# Altium PCB PCB_HW_.PcbDoc (part 1 of 2)
Units mm, origin at the board's own origin, x right, y up, seen from the top; angles counter-clockwise.
Board outline 140.28 x 161.54 mm, 2 copper layers (Top Layer, Bottom Layer); 173 components, 176 nets, 651 pads, 150 vias.
Unrouted connection lines stored in the file: 54.
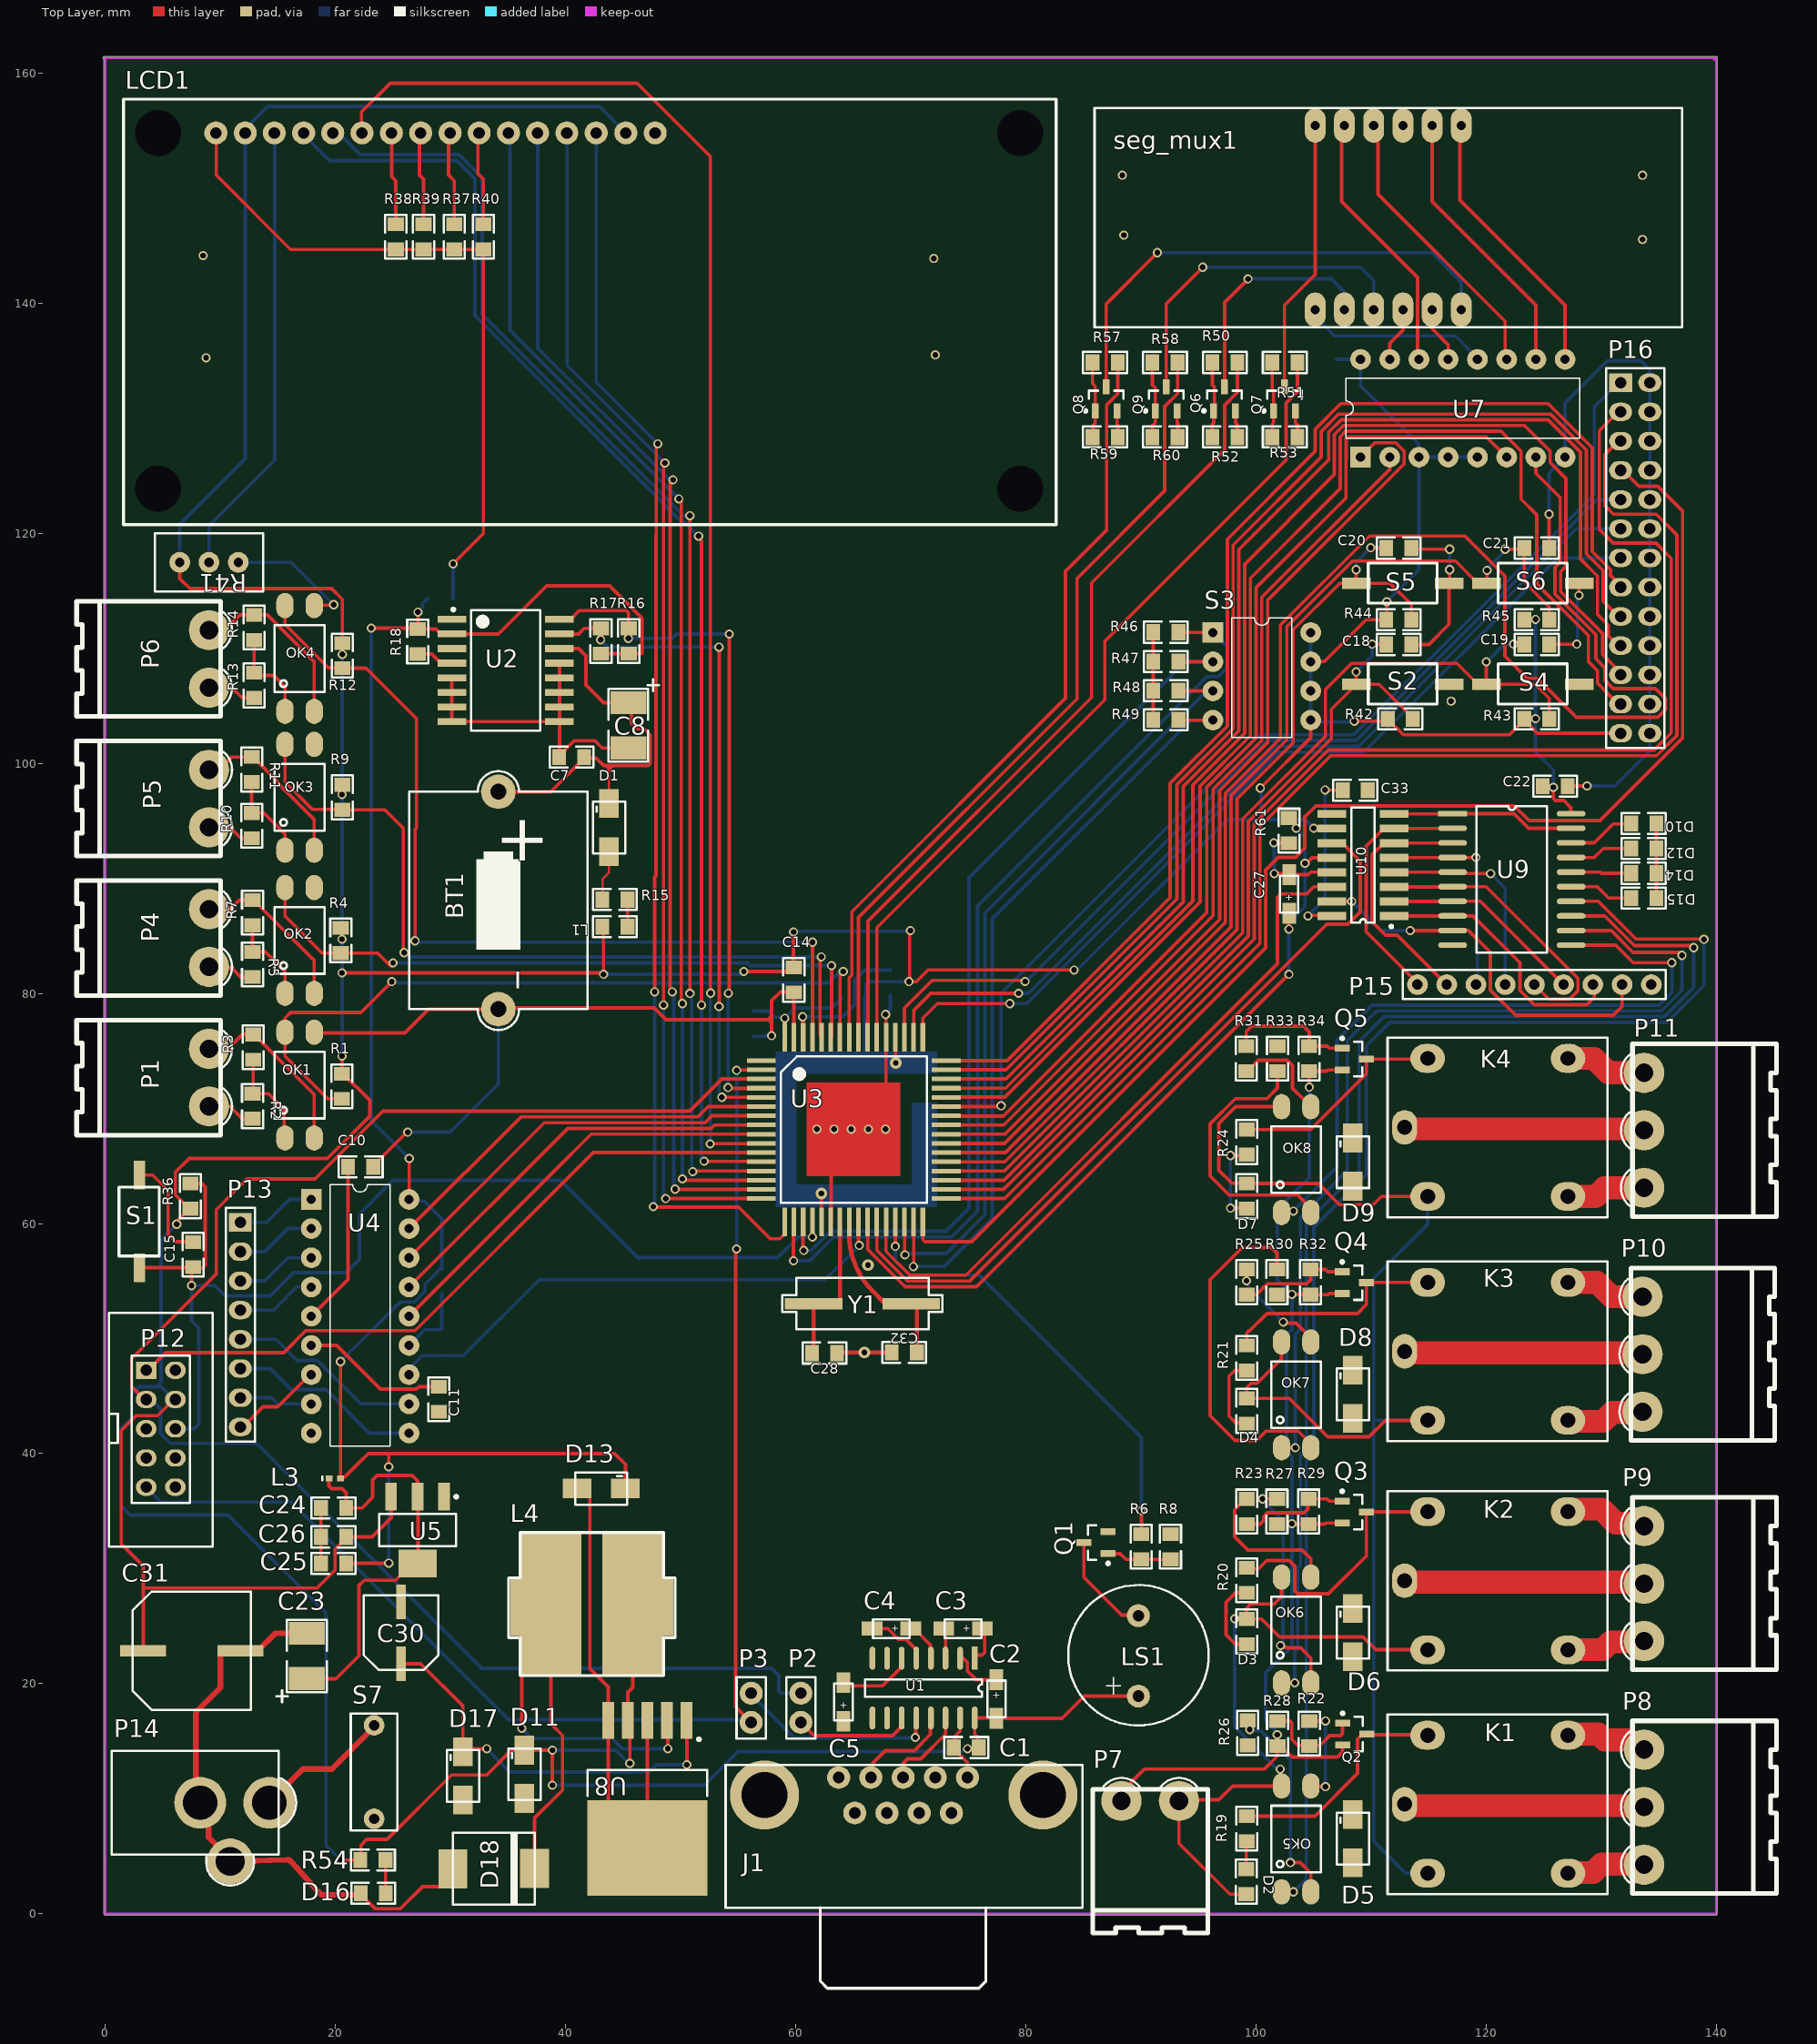
[diagram p0: Top Layer view]
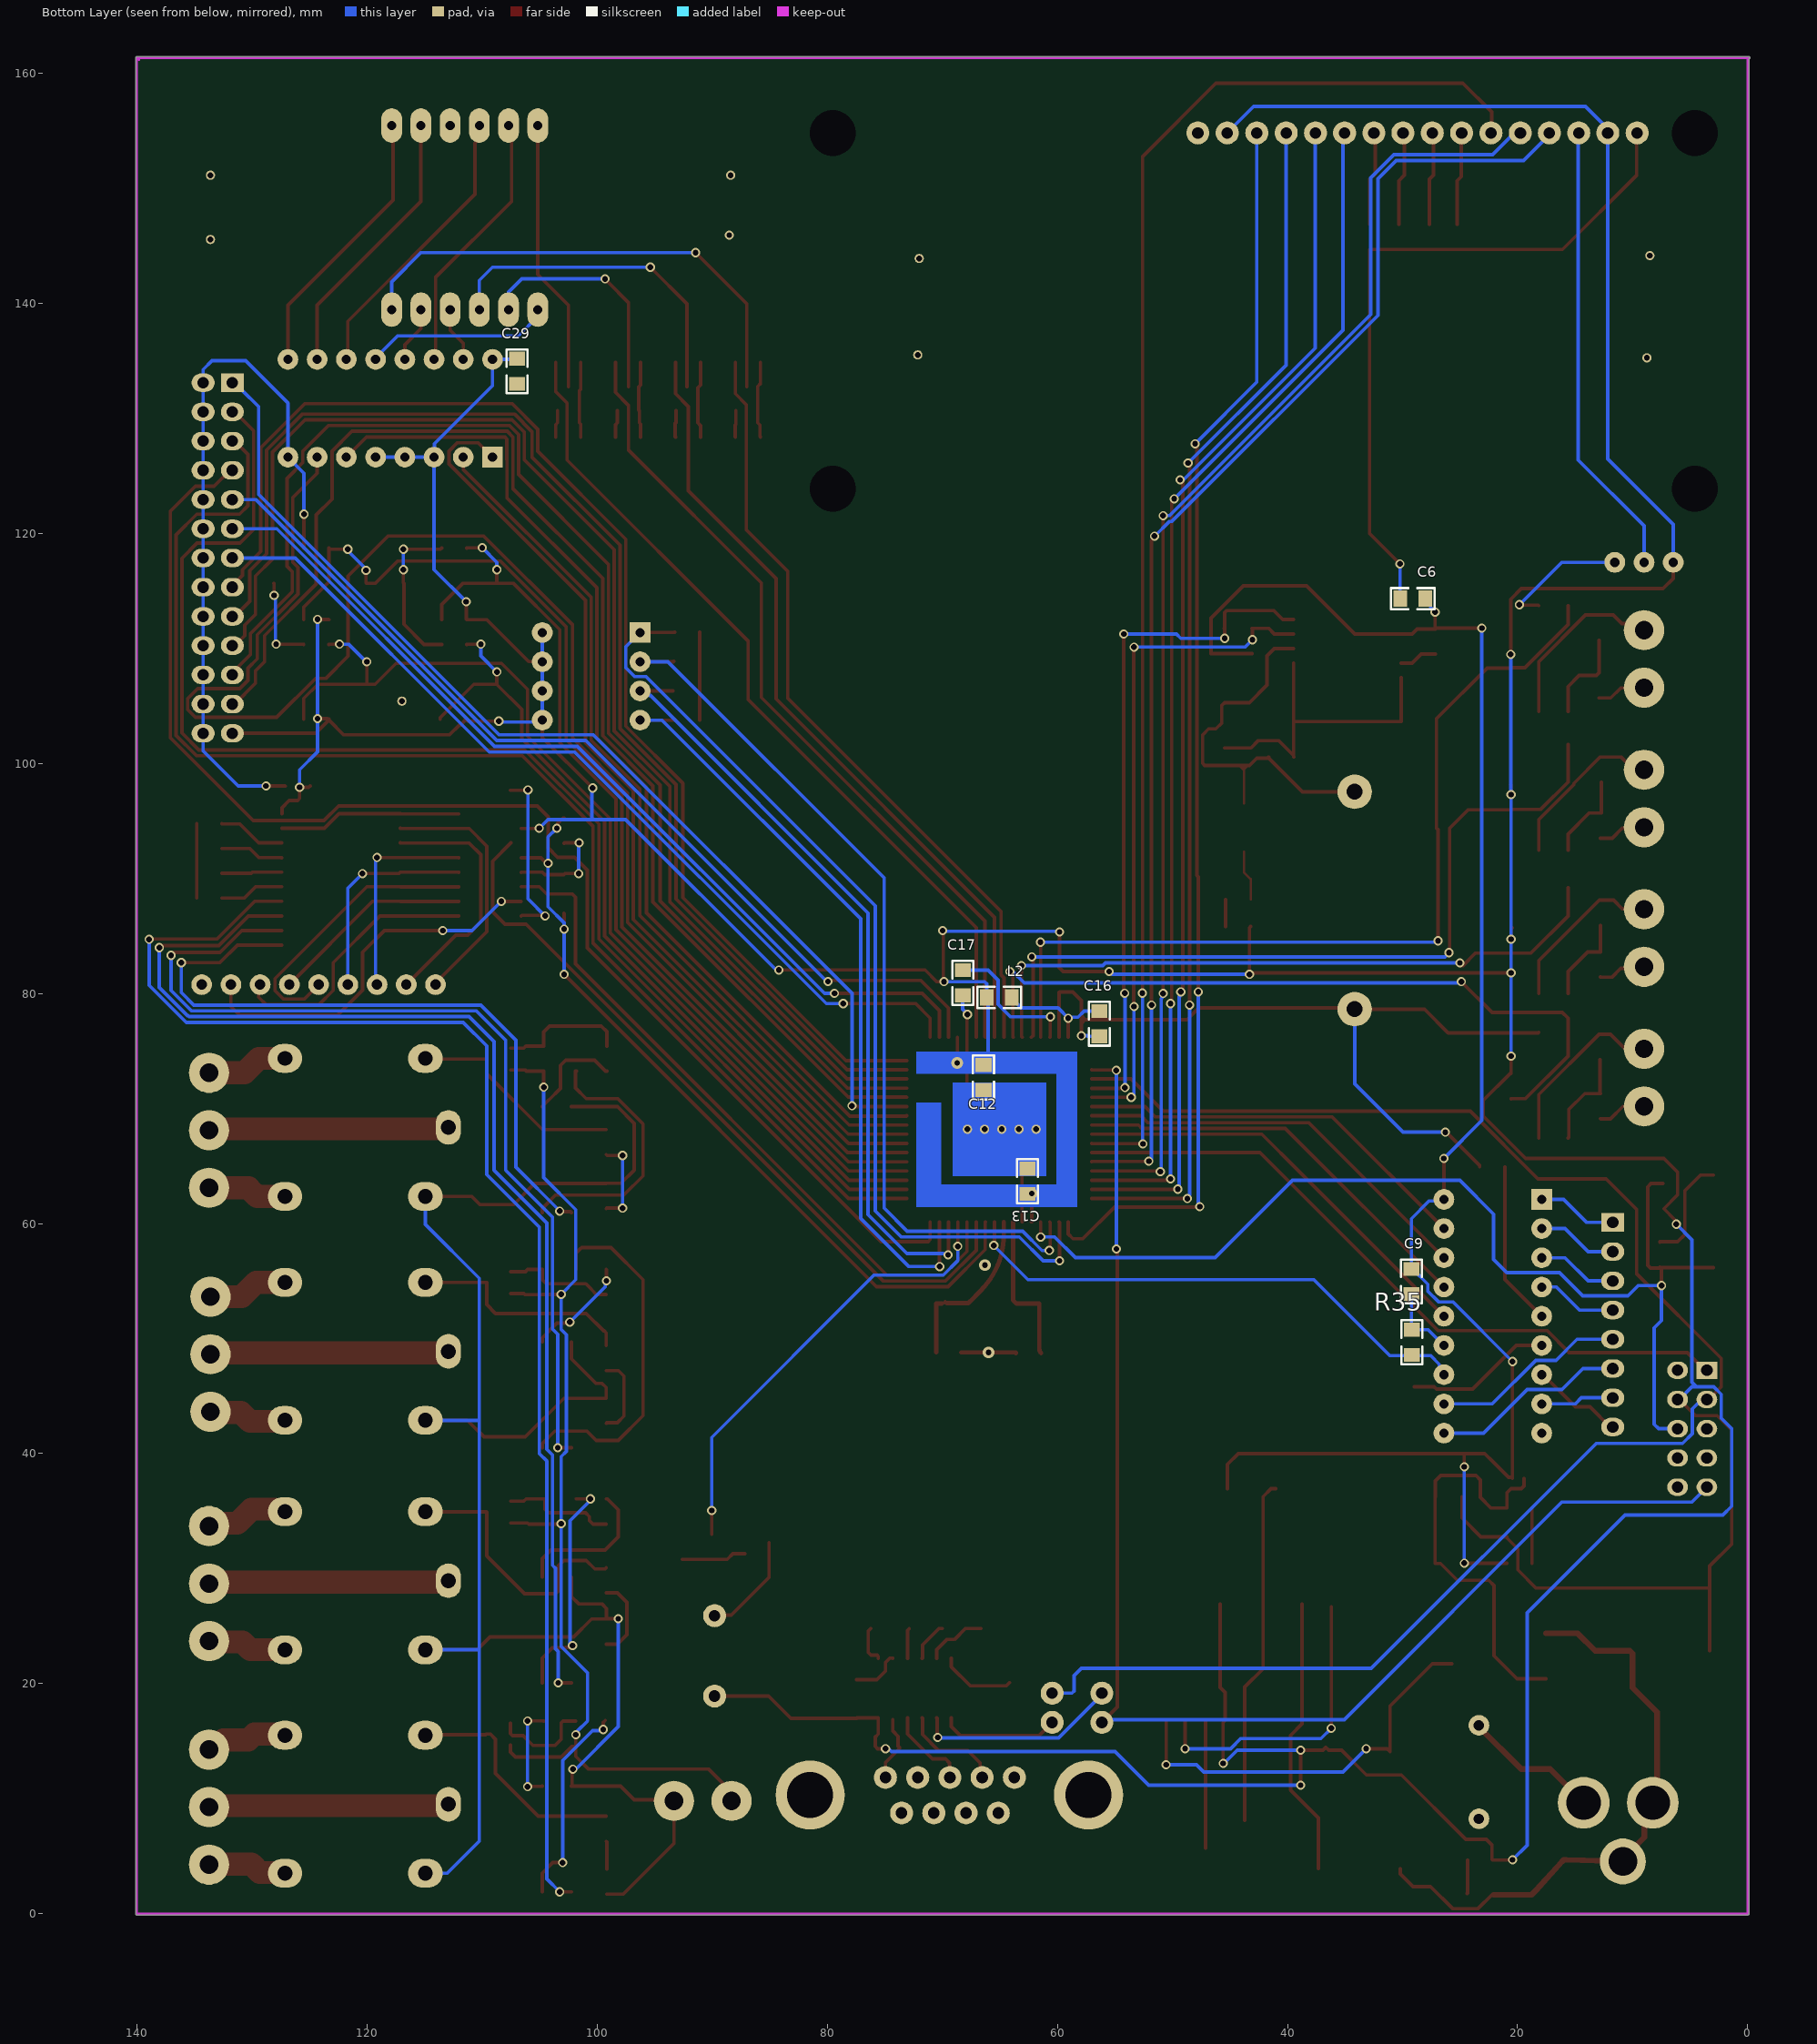
[diagram p1: Bottom Layer view, seen from below]

## Layer stack, top to bottom
Top Solder: solder mask 0.0102, Solder Resist, Dk 3.5
Top Layer: signal copper 0.0356
Dielectric 1: dielectric 0.32, FR-4, Dk 4.8
Bottom Layer: signal copper 0.0356
Bottom Solder: solder mask 0.0102, Solder Resist, Dk 3.5

## Board outline
-0.1,0 -0.1,161.213 -0.152,161.265 cw(c-0.081,161.336) -0.081,161.436 140,161.436 cw(c140,161.336) 140.1,161.336 140.1,0 cw(c140,0) 140,-0.1 0,-0.1 cw(c0,0)

## Design rules (kind name [scope] priority, off if disabled: settings)
Clearance [All] p1: gap=0.2 ignorepadtopadclearanceinfootprint=FALSE except(0.3: Arc-Fill Arc-Poly Arc-Region Track-Fill Track-Poly Track-Region SMDPad-Fill SMDPad-Poly SMDPad-Region THPad-Fill THPad-Poly THPad-Region Via-Fill Via-Poly Via-Region Fill-Fill Fill-Poly Fill-Region Poly-Poly Poly-Region Region-Region)
PolygonConnect [All] p1: connectstyle=Relief reliefconductorwidth=0.254 reliefentries=4 polygonreliefangle="90 Angle" airgapwidth=0.254
RoutingVias [All] p1: holewidth=0.5 width=0.8 viastyle="Through Hole" minholewidth=0.2 minwidth=0.2 maxholewidth=2 maxwidth=3
SolderMaskExpansion [All] p1: expansion=0.102 istentingtop=FALSE
Width [All] p1: maxlimit=2 minlimit=0.2 preferedwidth=0.3
30 further rules are at their usual default settings.

## Components (designator, comment, footprint, x,y, rotation, side; value= is the part's Value field where it differs from the comment)
BT1 "3V6" CHARGING_BATT 35.433,97.536 r270 top
C1 "100nF" smd_805 74.803,14.478 r270 top
C2 "Cap Pol1" CAP_SMD_A 77.47,18.669 r270 top value=1uF
C3 "tantalium A" CAP_SMD_A 74.549,24.765 r180 top value=1uF
C4 "tantalium A" CAP_SMD_A 68.326,24.765 r180 top value=1uF
C5 "Cap Pol1" CAP_SMD_A 64.135,18.415 r90 top value=1uF
C6 "Cap" smd_805 29.083,114.3 r90 bottom value=100nF
C7 "Cap" smd_805 40.513,100.584 r270 top value=100nF
C8 "Cap Pol1" C_B 45.464,103.242 r180 top value=10UF
C9 "Cap" smd_805 29.21,54.991 r0 bottom value=100nF
C10 "Cap" smd_805 22.225,64.897 r90 top value=10nF
C11 "Cap" smd_805 28.956,44.704 r0 top value=100nF
C12 "Cap" smd_805 66.446,72.669 r180 bottom value=100pF
C13 "Cap" smd_805 62.586,63.703 r0 bottom value=100pF
C14 "Cap" smd_805 59.817,81.153 r0 top value=100pF
C15 "100nF" SMD_805 7.62,57.277 r0 top
C16 "Cap" smd_805 56.388,77.343 r180 bottom value=100pF
C17 "Cap" SMD_805 68.25,80.899 r180 bottom value=100pF
C18 "100nF" smd_805 112.395,110.363 r270 top
C19 "100nF" smd_805 124.384,110.363 r270 top
C20 "100nF" smd_805 112.395,118.745 r270 top
C21 "100nF" smd_805 124.384,118.745 r270 top
C22 "Cap" smd_805 125.984,98.044 r270 top value=100nF
C23 "Cap Pol1" C_B 17.526,22.479 r0 top value=100uF
C24 "Cap" SMD_805 19.812,35.306 r270 top value=100nF
C25 "Cap" smd_805 19.812,30.48 r270 top value=100nF
C26 "Cap" smd_805 19.812,32.791 r270 top value=100nF
C27 "Cap Pol1" CAP_SMD_A 102.87,88.646 r90 top value=1uF
C28 "18pF" SMD_805 62.484,48.768 r270 top
C29 "Cap" smd_805 106.934,134.112 r0 bottom value=100nF
C30 "Cap Pol1" C_CYL_SMD2 25.908,24.511 r270 top value=100uF
C31 "Cap Pol1" C_CYL_smd 7.341,22.936 r180 top value=100uF
C32 "18pF" SMD_805 69.469,48.768 r90 top
C33 "Cap" smd_805 108.61,97.688 r270 top value=100nF
D1 "1N4148" tvs 43.815,94.488 r0 top
D2 "LED0" SMD_805 99.187,2.819 r180 top
D3 "LED0" SMD_805 99.187,24.511 r0 top
D4 "LED0" SMD_805 99.187,43.688 r0 top
D5 "1N4148" tvs 108.458,6.604 r0 top
D6 "1N4148" tvs 108.458,24.511 r0 top
D7 "LED0" SMD_805 99.187,62.357 r0 top
D8 "1N4148" tvs 108.458,45.212 r0 top
D9 "1N4148" tvs 108.458,65.405 r0 top
D10 "LED0" SMD_805 133.731,94.742 r90 top
D11 "D Zener" tvs 36.449,12.192 r0 top
D12 "LED0" SMD_805 133.731,92.583 r90 top
D13 "D Zener" tvs 43.18,36.932 r270 top
D14 "LED0" SMD_805 133.731,90.424 r90 top
D15 "LED0" SMD_805 133.731,88.265 r90 top
D16 "LED0" SMD_805 23.266,1.803 r270 top
D17 "Diode" TVS 31.115,12.065 r0 top
D18 "D Zener" DO_214_AB_SMC 33.782,3.937 r0 top
J1 "D Connector 9" COM 67.089,3.2 r0 top
K1 "Relay" RELAY_12v 120.46,9.37 r0 top
K2 "Relay" RELAY_12v 120.46,28.801 r0 top
K3 "Relay" RELAY_12v 120.46,48.74 r0 top
K4 "Relay" RELAY_12v 120.46,68.206 r0 top
L1 "FERRIT BEAD 0805" SMD_805 44.272,85.838 r270 top value=10uH
L2 "Inductor" smd_805 65.024,79.629 r90 bottom value=10uH
L3 "FERRIT BEAD 0805" 0402-A 19.947,37.846 r0 top value=10uH
L4 "INDUCTOR" INDUC_SMD 42.291,27.178 r0 top value=100uH
LCD1 "LCD16*2" LCD2X16 58.166,140.081 r0 top
LS1 "BUZZER" BUZZER 89.789,22.479 r90 top
OK1 "PC817" PC817_SMD 16.764,72.009 r90 top
OK2 "PC817" PC817_SMD 16.764,84.582 r90 top
OK3 "PC817" PC817_SMD 16.764,97.028 r90 top
OK4 "PC817" PC817_SMD 16.764,109.093 r90 top
OK5 "PC817" PC817_SMD 103.378,6.477 r90 top
OK6 "PC817" PC817_SMD 103.378,24.638 r90 top
OK7 "PC817" PC817_SMD 103.378,45.085 r90 top
OK8 "PC817" PC817_SMD 103.378,65.532 r90 top
P1 "Header 2" pHoenix_2 8.857,72.697 r270 top
P2 "Header 2" pin_2_w 60.452,17.907 r0 top
P3 "Header 2" pin_2_w 56.134,17.907 r0 top
P4 "Header 2" pHoenix_2 8.857,84.829 r270 top
P5 "Header 2" pHoenix_2 8.857,96.961 r270 top
P6 "Header 2" pHoenix_2 8.857,109.093 r270 top
P7 "Header 2" pHoenix_2 90.805,9.652 r0 top
P8 "Header 3" PHOENIX_3 133.731,9.271 r90 top
P9 "Header 3" PHOENIX_3 133.731,28.702 r90 top
P10 "Header 3" PHOENIX_3 133.604,48.641 r90 top
P11 "Header 3" PHOENIX_3 133.731,68.107 r90 top
P12 "Header 5X2" box2x5_3d 4.902,42.197 r90 top
P13 "Header 8" HEADER_1x8 11.557,51.181 r0 top
P14 "Header 2" ADAP_JACK 0.555,5.152 r0 top
P15 "ARAY 9" "Aray 9" 127.381,80.772 r270 top
P16 "Header 13X2" HEADER_2x13 132.867,118.974 r0 top
Q1 "BC817" SOT23 86.233,32.258 r90 top
Q2 "BC817" SOT23 108.458,15.621 r270 top
Q3 "BC817" SOT23 108.424,34.925 r270 top
Q4 "BC817" SOT23 108.424,54.864 r270 top
Q5 "BC817" SOT23 108.424,74.295 r270 top
Q6 "BC817" SOT23 97.282,131.572 r0 top
Q7 "BC817" SOT23 102.489,131.572 r0 top
Q8 "BC817" SOT23 86.995,131.572 r0 top
Q9 "BC817" SOT23 92.202,131.572 r0 top
R1 "10K" SMD_805 20.549,71.907 r0 top
R2 "2K2" SMD_805 12.827,70.231 r180 top
R3 "2K2" SMD_805 12.827,75.311 r0 top
R4 "10K" SMD_805 20.447,84.582 r0 top
R5 "2K2" SMD_805 12.827,82.55 r180 top
R6 "1K" SMD_805 90.016,31.879 r0 top
R7 "2K2" SMD_805 12.776,86.995 r0 top
R8 "10K" SMD_805 92.553,31.879 r0 top
R9 "10K" SMD_805 20.574,97.028 r0 top
R10 "2K2" SMD_805 12.751,94.615 r180 top
R11 "2K2" SMD_805 12.7,99.441 r0 top
R12 "10K" SMD_805 20.574,109.347 r0 top
R13 "2K2" SMD_805 12.954,106.807 r180 top
R14 "2K2" SMD_805 12.903,111.785 r0 top
R15 "200" SMD_805 44.323,88.138 r90 top
R16 "4.7 K" SMD_805 45.466,110.617 r0 top
R17 "4.7 K" SMD_805 43.053,110.617 r0 top
R18 "10K" SMD_805 27.178,110.617 r180 top
R19 "10K" SMD_805 99.187,7.366 r0 top
R20 "10K" SMD_805 99.187,28.956 r0 top
R21 "10K" SMD_805 99.187,48.285 r0 top
R22 "1K" SMD_805 104.615,15.641 r0 top
R23 "1K" SMD_805 99.187,34.945 r0 top
R24 "10K" SMD_805 99.187,67.056 r0 top
R25 "1K" SMD_805 99.187,54.884 r0 top
R26 "330" SMD_805 99.314,15.748 r180 top
R27 "330" SMD_805 101.854,34.995 r180 top
R28 "10K" SMD_805 101.905,15.691 r180 top
R29 "10K" SMD_805 104.615,34.995 r180 top
R30 "330" SMD_805 101.854,54.934 r180 top
R31 "1K" SMD_805 99.187,74.365 r180 top
R32 "10K" SMD_805 104.775,54.934 r180 top
R33 "330" SMD_805 101.854,74.315 r0 top
R34 "10K" SMD_805 104.648,74.365 r180 top
R35 "10K" SMD_805 29.21,49.657 r180 bottom
R36 "10K" SMD_805 7.366,62.357 r0 top
R37 "10K" SMD_805 30.353,145.796 r180 top
R38 "10K" SMD_805 25.273,145.796 r180 top
R39 "10K" SMD_805 27.686,145.796 r180 top
R40 "10K" SMD_805 32.893,145.796 r180 top
R41 "RPot" POT 13.716,114.935 r90 top value=10K
R42 "10K" SMD_805 112.522,103.886 r270 top
R43 "10K" SMD_805 124.384,103.886 r270 top
R44 "10K" SMD_805 112.395,112.522 r270 top
R45 "10K" SMD_805 124.384,112.522 r270 top
R46 "10K" SMD_805 92.202,111.379 r90 top
R47 "10K" SMD_805 92.202,108.839 r90 top
R48 "10K" SMD_805 92.202,106.299 r90 top
R49 "10K" SMD_805 92.202,103.759 r90 top
R50 "1K" SMD_805 97.282,134.874 r270 top
R51 "1K" SMD_805 102.489,134.874 r270 top
R52 "10K" SMD_805 97.282,128.397 r270 top
R53 "10K" SMD_805 102.489,128.397 r270 top
R54 "4.7 K" SMD_805 23.241,4.699 r270 top
R57 "1K" SMD_805 86.868,134.874 r270 top
R58 "1K" SMD_805 92.075,134.874 r270 top
R59 "10K" SMD_805 86.868,128.397 r270 top
R60 "10K" SMD_805 92.075,128.397 r270 top
R61 "6k8" SMD_805 102.845,94.132 r0 top
S1 "Switch PB" SMD_BUTTON 2.794,60.198 r90 top
S2 "SW-PB" SMD_BUTTON 112.776,107.061 r0 top
S3 "SW DIP-4" DIP_8P 96.266,111.379 r0 top
S4 "SW-PB" SMD_BUTTON 124.079,107.061 r0 top
S5 "SW-PB" SMD_BUTTON 112.776,115.824 r0 top
S6 "SW-PB" SMD_BUTTON 124.079,115.824 r0 top
S7 "Switch PB" KEY1 23.368,12.192 r270 top
seg_mux1 "7seg_mux4" S7_MUX 111.506,146.558 r180 top
U1 "MAX232ACPE" SOP16 75.565,22.218 r270 top
U2 "DS3231" SO16 34.798,108.077 r0 top
U3 "ATmega128-16AI" ATM128 65.051,68.022 r0 top
U4 "74C922" DIP_18P 17.907,62.103 r0 top
U5 "AMS1117-3.3" SOT223 27.178,33.401 r180 top
U7 "SN7448N" DIP_16P 109.093,126.619 r90 top
U8 "LM2576HVT" LM2576_SMD 47.117,6.117 r180 top
U9 "M74HC541B1R" SOP20 117.094,95.631 r0 top
U10 "M74HC595M1R" SO16_L 109.31,90.912 r180 top
Y1 "XTAL" xtal_smd 65.786,53.086 r0 top

## Footprints (in the part's own frame and the unit in brackets; to place one, negate y for a bottom-side part, rotate by r counter-clockwise, add the part's x,y. Pads: shape width x height; smd on the part's side, far side on the other; paste and mask are expansions set on the pad)
0402-A [mm] "Chip Inductor, Body 1.0x0.5mm, IPC High Density"
  rect 0.6x0.5 smd: 1(-0.5,0) 2(0.5,0)
  silkscreen extent -1.1,-0.15 -1.1,0.15, body extent -0.55,-0.3 0.55,0.3, height 0.55
ADAP_JACK [mm]
  round 4.5 hole 3: 1(7.7,4.5) 2(13.7,4.5)
  round 4 hole 2.5: 1(10.3,-0.6)
  silkscreen extent 0,-2.68 16.04,9, body extent -0.1,-0.5 14.7,9, height 10
"Aray 9" [mm]
  round 1.8 hole 0.9: 1(0,6.985) 2(0,4.445) 3(0,1.905) 4(0,-0.635) 5(0,-3.175) 6(0,-5.715) 7(0,-8.255) 8(0,-10.795) 9(0,-13.335)
  silkscreen extent -1.27,-14.6 1.27,8.25
ATM128 [mm]
  rect 2.5x0.4 smd: 1(-8.026,6.147) 2(-8.026,5.347) 3(-8.026,4.547) 4(-8.026,3.747) 5(-8.026,2.947) 6(-8.026,2.147) 7(-8.026,1.347) 8(-8.026,0.547) 9(-8.026,-0.253) 10(-8.026,-1.053) 11(-8.026,-1.853) 12(-8.026,-2.653) 13(-8.026,-3.453) 14(-8.026,-4.253) 15(-8.026,-5.053) 16(-8.026,-5.853) 33(8.036,-5.853) 34(8.036,-5.053) 35(8.036,-4.253) 36(8.036,-3.453) 37(8.036,-2.653) 38(8.036,-1.853) 39(8.036,-1.053) 40(8.036,-0.253) 41(8.036,0.547) 42(8.036,1.347) 43(8.036,2.147) 44(8.036,2.947) 45(8.036,3.747) 46(8.036,4.547) 47(8.036,5.347) 48(8.036,6.147)
  rect 0.4x2.5 smd: 17(-5.995,-7.884) 18(-5.195,-7.884) 19(-4.395,-7.884) 20(-3.595,-7.884) 21(-2.795,-7.884) 22(-1.995,-7.884) 23(-1.195,-7.884) 24(-0.395,-7.884) 25(0.405,-7.884) 26(1.205,-7.884) 27(2.005,-7.884) 28(2.805,-7.884) 29(3.605,-7.884) 30(4.405,-7.884) 31(5.205,-7.884) 32(6.005,-7.884) 49(6.005,8.178) 50(5.205,8.178) 51(4.405,8.178) 52(3.605,8.178) 53(2.805,8.178) 54(2.005,8.178) 55(1.205,8.178) 56(0.405,8.178) 57(-0.395,8.178) 58(-1.195,8.178) 59(-1.995,8.178) 60(-2.795,8.178) 61(-3.595,8.178) 62(-4.395,8.178) 63(-5.195,8.178) 64(-5.995,8.178)
  silkscreen extent -6.35,-6.2 6.35,6.5
box2x5_3d [mm]
  rect 1.5x1.8 hole 1: 1(5.047,1.346)
  oval 1.5x1.8 hole 1: 2(5.047,-1.194) 3(2.507,1.346) 4(2.507,-1.194) 5(-0.033,1.346) 6(-0.033,-1.194) 7(-2.573,1.346) 8(-2.573,-1.194) 9(-5.113,1.346) 10(-5.113,-1.194)
  silkscreen extent -10.29,-4.45 10.03,4.57, body extent -10.41,-4.57 10.16,4.7, height 8
BUZZER [mm]
  round 2 hole 1: 1(-3.556,0) 2(3.429,0)
  silkscreen extent -6.11,-6.1 6.1,6.1
C_B [mm]
  rect 3.1x2 smd: 1(-0.002,-2.041) 2(-0.002,1.896)
  silkscreen extent -2.67,-4.07 1.73,3.07, body extent -1.4,-1.78 1.4,1.78, height 2.23
C_CYL_smd [mm]
  rect 4x1 smd: 1(4.039,0.076) 2(-4.42,0.076)
  silkscreen extent -5.33,-5.08 4.97,5.22, body extent -5.33,-5.08 4.97,5.22, height 10
C_CYL_SMD2 [mm]
  rect 3x0.8 smd: 1(2.769,-0.203) 2(-2.616,-0.203)
  silkscreen extent -3.18,-3.45 3.32,3.05, body extent -3.18,-3.45 3.32,3.05, height 5
CAP_SMD_A [mm]
  rect 1.8x1.2 smd: 1(-1.676,-0.025) 2(1.676,-0.025)
  silkscreen extent -1.6,-0.81 1.6,0.79
CHARGING_BATT [mm]
  round 3 hole 1.4: 1(0,-1.27) 2(18.9,-1.27)
  silkscreen extent -1.79,-9.02 20.72,6.48
COM [mm]
  round 2 hole 1: 1(-3.35,8.65) 2(-0.55,8.65) 3(2.25,8.65) 4(5.05,8.65) 5(7.85,8.65) 6(-1.95,5.563) 7(0.85,5.563) 8(3.65,5.563) 9(6.45,5.563)
  round 6 hole 4: 10(14.4,7.125) 11(-9.794,7.125)
  silkscreen extent -13.18,-9.67 17.83,9.72
DIP_8P [mm]
  rect 1.8x1.8 hole 0.8: 1(0,0)
  round 1.8 hole 0.8: 2(0,-2.54) 3(0,-5.08) 4(0,-7.62) 5(8.5,-7.62) 6(8.5,-5.08) 7(8.5,-2.54) 8(8.5,0)
  silkscreen extent 1.63,-9.14 6.87,1.27, body extent 1.65,-9.14 6.86,1.27, height 3
DIP_16P [mm]
  rect 1.8x1.8 hole 0.8: 1(0,0)
  round 1.8 hole 0.8: 2(0,-2.54) 3(0,-5.08) 4(0,-7.62) 5(0,-10.16) 6(0,-12.7) 7(0,-15.24) 8(0,-17.78) 9(8.5,-17.78) 10(8.5,-15.24) 11(8.5,-12.7) 12(8.5,-10.16) 13(8.5,-7.62) 14(8.5,-5.08) 15(8.5,-2.54) 16(8.5,0)
  silkscreen extent 1.63,-19.05 6.87,1.27
DIP_18P [mm]
  rect 1.8x1.8 hole 0.8: 1(0,0)
  round 1.8 hole 0.8: 2(0,-2.54) 3(0,-5.08) 4(0,-7.62) 5(0,-10.16) 6(0,-12.7) 7(0,-15.24) 8(0,-17.78) 9(0,-20.32) 10(8.5,-20.32) 11(8.5,-17.78) 12(8.5,-15.24) 13(8.5,-12.7) 14(8.5,-10.16) 15(8.5,-7.62) 16(8.5,-5.08) 17(8.5,-2.54) 18(8.5,0)
  silkscreen extent 1.63,-21.46 6.87,1.27
DO_214_AB_SMC [mm]
  rect 2.5x3.4 smd: 1(-3.581,-0.025) 2(3.531,0)
  silkscreen extent -3.58,-3.12 3.53,3.1
HEADER_1x8 [mm]
  rect 2x1.6 hole 1: 1(0.178,8.915)
  oval 2x1.6 hole 1: 2(0.178,6.375) 3(0.178,3.835) 4(0.178,1.295) 5(0.178,-1.245) 6(0.178,-3.785) 7(0.178,-6.325) 8(0.178,-8.865)
  silkscreen extent -1.09,-10.13 1.45,10.19
HEADER_2x13 [mm]
  rect 2x1.6 hole 1: 1(-1.168,14.122)
  oval 2x1.6 hole 1: 2(1.372,14.122) 3(-1.168,11.582) 4(1.372,11.582) 5(-1.168,9.042) 6(1.372,9.042) 7(-1.168,6.502) 8(1.372,6.502) 9(-1.168,3.962) 10(1.372,3.962) 11(-1.168,1.422) 12(1.372,1.422) 13(-1.168,-1.118) 14(1.372,-1.118) 15(-1.168,-3.658) 16(1.372,-3.658) 17(-1.168,-6.198) 18(1.372,-6.198) 19(-1.168,-8.738) 20(1.372,-8.738) 21(-1.168,-11.278) 22(1.372,-11.278) 23(-1.168,-13.818) 24(1.372,-13.818) 25(-1.168,-16.358) 26(1.372,-16.358)
  silkscreen extent -2.44,-17.63 2.64,15.39
INDUC_SMD [mm]
  rect 2x5 smd: 1(-6.096,-0.508) 2(6.096,-0.508)
  rect 5.3x12.4 smd: 1(-3.556,-0.254) 2(3.556,-0.254)
  silkscreen extent -7.23,-6.48 7.24,5.97
KEY1 [mm]
  round 1.8 hole 0.9: 1(-4.191,0) 2(3.937,0)
  silkscreen extent -5.21,-2.03 4.95,2.03, body extent -5.21,-2.03 4.95,2.03, height 7.1
LCD2X16 [mm]
  round 0 hole 4: 0(-53.575,-16.2) 0(-53.575,14.725) 0(21.35,-16.2) 0(21.35,14.725)
  round 2 hole 1: 1(-48.55,14.725) 2(-46,14.725) 3(-43.475,14.725) 4(-40.925,14.725) 5(-38.4,14.725) 6(-35.85,14.725) 7(-33.3,14.725) 8(-30.75,14.725) 9(-28.2,14.725) 10(-25.675,14.725) 11(-23.125,14.725) 12(-20.6,14.725) 13(-18.05,14.725) 14(-15.5,14.725) 15(-12.925,14.725) 16(-10.375,14.725)
  silkscreen extent -56.57,-19.32 24.48,17.65
LM2576_SMD [mm]
  rect 1.05x3.2 smd: 1(-3.4,-10.699) 2(-1.7,-10.699) 3(0,-10.699) 4(1.7,-10.699) 5(3.4,-10.699)
  rect 10.45x8.3 smd: 3(0,0.402)
  silkscreen extent -5.2,-9.17 5.2,-4.15, body extent -5.2,-6.4 5.2,3, height 4.65
PC817_SMD [mm]
  oval 2.2x1.5 smd: 1(-4.572,1.143) 2(-4.572,-1.397) 3(4.628,-1.397) 4(4.628,1.143)
  silkscreen extent -2.87,-2.29 2.92,2.03
pHoenix_2 [mm]
  round 3.5 hole 1.6: 1(-2.487,0.16) 2(2.513,0.16)
  silkscreen extent -4.99,-11.34 5.01,2.16
PHOENIX_3 [mm]
  round 3.5 hole 1.6: 1(5,0) 2(0,0) 3(-5,0)
  silkscreen extent -7.5,-11.5 7.5,2
pin_2_w [mm]
  round 2 hole 1: 1(0,1.27) 2(0,-1.27)
  silkscreen extent -1.27,-2.67 1.27,2.67
POT [mm]
  round 1.8 hole 0.8: 1(2.54,2.159) 2(2.54,7.239) 3(2.54,4.699)
  silkscreen extent 0,0 5.08,9.4
RELAY_12v [mm]
  oval 2.2x3 hole 1.3: 1(-7.533,0.151)
  oval 3x2.5 hole 1.3: 2(6.667,6.151) 3(6.667,-5.849) 4(-5.533,-5.849) 5(-5.533,6.151)
  silkscreen extent -9.02,-7.65 10.08,7.95, body extent -8.92,-7.62 10.18,7.88, height 15.3
S7_MUX [mm]
  oval 1.8x3 hole 0.8: 1(-6.35,7.112) 2(-3.81,7.112) 3(-1.27,7.112) 4(1.27,7.112) 5(3.81,7.112) 6(6.35,7.112) 7(-6.35,-8.89) 8(-3.81,-8.89) 9(-1.27,-8.89) 10(1.27,-8.89) 11(3.81,-8.89) 12(6.35,-8.89)
  silkscreen extent -25.53,-10.41 25.53,8.64
smd_805 [mm]
  rect 1.4x1.2 smd: 1(0.025,1.118) 2(0.025,-1.067)
  silkscreen extent -0.89,-1.88 0.94,1.93, body extent -0.66,-1.07 0.71,1.14, height 1.1
SMD_805 [mm]
  rect 1.4x1.2 smd: 1(0.025,1.118) 2(0.025,-1.067)
  silkscreen extent -0.89,-1.88 0.94,1.93, body extent -0.66,-1.07 0.71,1.14, height 1.1
SMD_BUTTON [mm]
  rect 2.5x1 smd: 1(4.013,-0.178) 2(-4.039,-0.178)
  silkscreen extent -3.02,-1.9 2.98,1.6
SO16 [mm]
  rect 2.5x0.6 smd: 1(-4.677,4.445) 2(-4.677,3.175) 3(-4.677,1.905) 4(-4.677,0.635) 5(-4.677,-0.635) 6(-4.677,-1.905) 7(-4.677,-3.175) 8(-4.677,-4.445) 9(4.677,-4.445) 10(4.677,-3.175) 11(4.677,-1.905) 12(4.677,-0.635) 13(4.677,0.635) 14(4.677,1.905) 15(4.677,3.175) 16(4.677,4.445)
  silkscreen extent -4.67,-5.25 3,5.42, body extent -3.75,-5.25 3.75,5.25, height 2.65
SO16_L [mm]
  rect 2.5x0.7 smd: 1(-2.704,4.191) 2(-2.704,2.921) 3(-2.704,1.651) 4(-2.704,0.381) 5(-2.704,-0.889) 6(-2.704,-2.159) 7(-2.704,-3.429) 8(-2.704,-4.699) 9(2.704,-4.699) 10(2.704,-3.429) 11(2.704,-2.159) 12(2.704,-0.889) 13(2.704,0.381) 14(2.704,1.651) 15(2.704,2.921) 16(2.704,4.191)
  silkscreen extent -2.58,-5.25 1.02,5.22, body extent -2,-5.25 2,4.75, height 1.75
SOP16 [mm]
  rect 2x0.5 smd: 1(0,0)
  oval 2x0.5 smd: 2(0,-1.27) 3(0,-2.54) 4(0,-3.81) 5(0,-5.08) 6(0,-6.35) 7(0,-7.62) 8(0,-8.89) 9(5.2,-8.89) 10(5.2,-7.62) 11(5.2,-6.35) 12(5.2,-5.08) 13(5.2,-3.81) 14(5.2,-2.54) 15(5.2,-1.27) 16(5.2,0)
  silkscreen extent 1.84,-9.53 3.36,0.64
SOP20 [mm]
  rect 2.5x0.5 smd: 1(0,0)
  oval 2.5x0.5 smd: 2(0,-1.27) 3(0,-2.54) 4(0,-3.81) 5(0,-5.08) 6(0,-6.35) 7(0,-7.62) 8(0,-8.89) 9(0,-10.16) 10(0,-11.43) 11(10.3,-11.43) 12(10.3,-10.16) 13(10.3,-8.89) 14(10.3,-7.62) 15(10.3,-6.35) 16(10.3,-5.08) 17(10.3,-3.81) 18(10.3,-2.54) 19(10.3,-1.27) 20(10.3,0)
  silkscreen extent 2.08,-12.06 8.22,0.64, body extent 1.27,-12.06 9.02,0.76, height 1.6
SOT23 [mm]
  rect 0.6x1.3 smd: 1(-0.95,-0.923) 2(0.95,-0.923) 3(0,1.177)
  silkscreen extent -1.92,-1.05 1.5,0.83, body extent -1.5,-0.57 1.5,0.83, height 1.1
SOT223 [mm]
  rect 1x2.4 smd: 1(-2.269,-2.85) 2(0.031,-2.85) 3(2.331,-2.85)
  rect 3.3x2.4 smd: 2(0.031,2.95)
  silkscreen extent -3.44,-2.97 3.38,1.45, body extent -3.21,-3.44 3.27,3.54, height 1.64
tvs [mm]
  rect 1.7x2.5 smd: 1(-0.025,-2.159) 2(-0.025,2.032)
  silkscreen extent -1.42,-2.32 1.38,2.18, body extent -1.5,-2.76 1.42,2.74, height 2.23
TVS [mm]
  rect 1.7x2.5 smd: 1(-0.025,-2.159) 2(-0.025,2.032)
  silkscreen extent -1.42,-2.32 1.38,2.18, body extent -1.5,-2.76 1.42,2.74, height 2.23
xtal_smd [mm]
  rect 5x1 smd: 1(-4.216,-0.051) 2(4.267,-0.051)
  silkscreen extent -6.93,-2.29 6.98,2.21

## Part data
BT1: library part Battery, "Multicell Battery", LatestRevisionDate=17-Jul-2002, LatestRevisionNote="Re-released for DXP Platform.", PackageDescription="Battery; 2 Leads", PackageReference=BAT-2, Published=24-Mar-1999, Publisher="Altium Limited"
C1 C15 C18 C19 C20 C21 C28 C32: library part "CAP SMD 1206", "CAP 1206", Data=16-12-2016, Desc.="CAP SMD 1206", Designer="Abbas Basereh"
C2 C5 C8 C23 C27 C30 C31: "Polarized Capacitor (Radial)", LatestRevisionDate=17-Jul-2002, LatestRevisionNote="Re-released for DXP Platform.", PackageDescription="Polarized Capacitor (Radial); 2 Leads", PackageReference=RB7.6-15, Published=8-Jun-2000, Publisher="Altium Limited"
C3 C4: library part "Cap Pol1", "Polarized Capacitor (Radial)", LatestRevisionDate=17-Jul-2002, LatestRevisionNote="Re-released for DXP Platform.", PackageDescription="Polarized Capacitor (Radial); 2 Leads", PackageReference=RB7.6-15, Published=8-Jun-2000, Publisher="Altium Limited"
C6 C7 C9 C10 C11 C12 C13 C14 C16 C17 C22 C24 C25 C26 C29 C33: "Capacitor", LatestRevisionDate=17-Jul-2002, LatestRevisionNote="Re-released for DXP Platform.", PackageDescription="Radial Cap, Thru-Hole; 2 Leads; 0.3 in Pin Spacing", PackageReference=RAD-0.3, Published=8-Jun-2000, Publisher="Altium Limited"
D1 D5 D6 D8 D9: "Small Signal Fast Switching Diodes", Package=None, Availability=Unavailable, MP=1N4148, Price=None
D2 D3 D4 D7 D10 D12 D14 D15 D16: "Typical INFRARED GaAs LED", LatestRevisionDate=08-Jul-2005, LatestRevisionNote="Mech Layer 1 removed.", PackageDescription="LED; 2 Leads", PackageReference=LED-0, Published=8-Jun-2000, Publisher="Altium Limited"
D11 D13 D18: "Zener Diode", LatestRevisionDate=17-Jul-2002, LatestRevisionNote="Re-released for DXP Platform.", PackageDescription="Diode, Thru-Hole; 2 Leads; 0.7 in Pin Spacing", PackageReference=DIODE-0.7, Published=8-Jun-2000, Publisher="Altium Limited"
D17: "Default Diode", Code_JEDEC=DO-214-AB, LatestRevisionDate=17-Jul-2002, LatestRevisionNote="Re-released for DXP Platform.", PackageDescription="DO-214-AB/SMC; 2 C-Bend Leads; Body 7.9 x 5.9 mm, inc. leads (LxW)", PackageReference=SMC, PackageVersion=Sep-1996, Published=8-Jun-2000, Publisher="Altium Limited"
J1: "Receptacle Assembly, 9 Position, Right Angle", PackageDocument=O, DatasheetDocument=1-Sep-1999, Gender=Receptacle, LatestRevisionDate=17-Jul-2002, LatestRevisionNote="Re-released for DXP Platform.", Orientation="Right Angle", PackageReference=788750, Positions=9, Published=15-Jun-2001, Publisher="Altium Limited"
K1 K2 K3 K4: "SPDT Relay", LatestRevisionDate=17-Jul-2002, LatestRevisionNote="Re-released for DXP Platform.", PackageReference=MODULE5B, Published=8-Jun-2000, Publisher="Altium Limited"
L1 L3 L4: library part Inductor, "Inductor", Code_IEC=1005, Code_JEITA=0402, LatestRevisionDate=29-May-2009, LatestRevisionNote="IPC-7351 Footprint Added.", PackageDescription="Chip Inductor", PackageReference=0402-A, Published=8-Jun-2000, Publisher="Altium Limited"
LS1: library part Speaker, "Loudspeaker", LatestRevisionDate=17-Jul-2002, LatestRevisionNote="Re-released for DXP Platform.", PackageReference=PIN2, Published=24-Mar-1999, Publisher="Altium Limited"
OK1 OK2 OK3 OK4 OK5 OK6 OK7 OK8: "RF Mixer IC Cellular, DCS, PCS, W-CDMA, WLAN Up Converter 50MHz ~ 400MHz 6-SuperMiniMold", Package=None, Availability="In Stock", Check_prices=https://www.snapeda.com/parts/PC817/Renesas/view-part/6617977/?ref=eda, MF="Renesas Electronics America Inc", MP=PC817, Price=None, Purchase-URL=https://pricing.snapeda.com/search/part/PC817/?ref=eda, SnapEDA_Link=https://www.snapeda.com/parts/PC817/Renesas/view-part/6617977/?ref=snap
P1 P2 P3 P4 P5 P6 P7 P14: "Header, 2-Pin", LatestRevisionDate=17-Jul-2002, LatestRevisionNote="Re-released for DXP Platform.", Publisher="Altium Limited"
P8 P9 P10 P11: "Header, 3-Pin", LatestRevisionDate=17-Jul-2002, LatestRevisionNote="Re-released for DXP Platform.", Publisher="Altium Limited"
P12: "Header, 5-Pin, Dual row", LatestRevisionDate=17-Jul-2002, LatestRevisionNote="Re-released for DXP Platform.", Publisher="Altium Limited"
P13: "Header, 8-Pin", LatestRevisionDate=17-Jul-2002, LatestRevisionNote="Re-released for DXP Platform.", Publisher="Altium Limited"
P15: library part "Header 9", "Header, 9-Pin", LatestRevisionDate=17-Jul-2002, LatestRevisionNote="Re-released for DXP Platform.", Publisher="Altium Limited"
P16: "Header, 13-Pin, Dual row", LatestRevisionDate=17-Jul-2002, LatestRevisionNote="Re-released for DXP Platform.", Publisher="Altium Limited"
Q1 Q2 Q3 Q4 Q5 Q6 Q7 Q8 Q9: "Bipolar _BJT_ Transistor NPN 45V 500mA 100MHz 300mW Surface Mount SOT-23-3 _TO-236_", Package="SOT-23-3 Rectron", Availability=Unavailable, MF="Nexperia USA", MP=BC817, Price=None, SnapEDA_Link=https://www.snapeda.com/parts/BC817/Nexperia%20USA%20Inc./view-part/4219270/?ref=snap
R1 R2 R3 R4 R5 R6 R7 R8 R9 R10 R11 R12 R13 R14 R15 R16 R17 R18 R19 R20 R21 R22 R23 R24 R25 R26 R27 R28 R29 R30 R31 R32 R33 R34 R35 R36 R37 R38 R39 R40 R42 R43 R44 R45 R46 R47 R48 R49 R50 R51 R52 R53 R54 R57 R58 R59 R60 R61: library part "RES 0805 0.125W", "RES 0805", Data=16-12-2016, Desc.="RES SMD 0805", Designer="Abbas Basereh"
R41: "Potentiometer", LatestRevisionDate=17-Jul-2002, LatestRevisionNote="Re-released for DXP Platform.", PackageDescription="Variable Resistor, Thru-Hole; 3 Leads", PackageReference=VR5, Published=8-Jun-2000, Publisher="Altium Limited", Set Position=0.5, Sim Note="Enter the Resistance value and the set point into parameter fields."
S1 S7: "Push Button Switch"
S2 S4 S5 S6: "Switch", LatestRevisionDate=17-Jul-2002, LatestRevisionNote="Re-released for DXP Platform.", PackageDescription="Switch; 2 Leads", PackageReference=SPST-2, Published=24-Mar-1999, Publisher="Altium Limited"
S3: "DIP Switch, 4 Position, SPST", Code_IPC=SOIC127P600-8, Code_JEDEC=MS-012-AA, LatestRevisionDate=29-May-2009, LatestRevisionNote="IPC-7351 Footprint Added.", PackageDescription="8-Pin Small Outline Integrated Circuit 1.27 mm Pitch", PackageReference=SO8, PackageVersion=Dec-2002, Published=24-Mar-1999, Publisher="Altium Limited"
U1: "+5V Powered, Multi-Channel RS-232 Driver/Receiver", Code_JEDEC=MS-001-BB, ComponentLink1Description="Manufacturer Link", ComponentLink1URL=http://www.maxim-ic.com/, ComponentLink2Description=Datasheet, ComponentLink2URL=http://pdfserv.maxim-ic.com/en/ds/MAX220-MAX249.pdf, LatestRevisionDate=29-May-2009, LatestRevisionNote="Component Body Added.", PackageDescription="DIP, 16-Pin, Row Spacing 7.62 mm, Pitch 2.54 mm", PackageReference=PE16A, PackageVersion=1997, Published=16-Jan-2001, Publisher="Altium Limited"
U3: "8-Bit AVR Microcontroller with 128K Bytes of In-System Programmable Flash Memory", Code_JEDEC=MS-026-AEB, ComponentLink1Description="Manufacturer Link", ComponentLink1URL=http://www.atmel.com, ComponentLink2Description=Datasheet, ComponentLink2URL=http://www.atmel.com/dyn/resources/prod_documents/doc2467.pdf, DatasheetVersion=2467G-AVR-09/02, LatestRevisionDate=13-Apr-2006, LatestRevisionNote="IPC-7351 Footprint Added.", PackageDescription="64-Pin Thin Quad Flat Pack 0.8 mm Pitch", PackageReference=64A, PackageVersion="revB, Oct-2001", Published=17-Sep-2003, Publisher="Altium Limited"
U4: library part Component_1
U5: library part LD1117DT33
U7: "BCD-to-Seven-Segment Decoder/Driver", Code_JEDEC=MS-001-BB, ComponentAvailability=Obsolete, ComponentLink1Description="Manufacturer Link", ComponentLink1URL=http://www.ti.com/, ComponentLink2Description=Datasheet, ComponentLink2URL=http://www-s.ti.com/sc/ds/sn7448.pdf, ComponentLink3Description="URL Link1", ComponentLink3URL=http://focus.ti.com/docs/prod/folders/print/sn7448.html, DatasheetVersion=Mar-1988, LatestRevisionDate=29-May-2009, LatestRevisionNote="Component Body Added.", PackageDescription="DIP, 16-Pin, Row Spacing 7.62 mm, Pitch 2.54 mm", PackageReference=N016, PackageVersion=Oct-1995, Published=8-Jun-2000, Publisher="Altium Limited"
U8: library part LM2576HVT-3.3, "SIMPLE SWITCHER® 3A Step-Down Voltage Regulator, 5-pin TO-220", Manufacturer="National Semiconductor", PackageTopMarking="NSUZXYTT*LM2576HVT*-3.3 P+", Code_JEDEC=TO-220-AB, ComponentLink1Description="LM2576HV Datasheet", ComponentLink1URL=http://www.national.com/ds/LM/LM2576HV.pdf, ComponentLink2Description="LM2576HV Web Page", CompType=Switcher, DatasheetVersion=Aug-2004, PackageDescription="TO-220, Molded, 5 Lead, Straight", PackageReference=T05A, PackageVersion="revJ, Jan-1992", PartNumber=LM2576HVT-3.3, PinCount=5, Published=4-Dec-2008, Publisher="Altium Limited", RoHS=Y
U9: "Octal Bus Buffer with 3 State Outputs (Non Inverted)", Code_JEDEC=MS-015-AE, ComponentLink1Description="Manufacturer Link", ComponentLink1URL=http://www.st.com/, DatasheetVersion=Oct-1993, LatestRevisionDate=06-Jun-2005, LatestRevisionNote="Stylized 3D Model Added.", PackageDescription="DIP; 20 Leads; Row Spacing 7.62 mm; Pitch 2.54 mm", PackageReference=DIP20, PackageVersion=Jun-1998, Published=8-Jun-2000, Publisher="Altium Limited"
U10: "8 Bit Shift Register with Output Latches (3 STATE)", Code_IPC=SOIC127P600-16, ComponentLink1Description="Manufacturer Link", ComponentLink1URL=http://www.st.com/, ComponentLink2Description=Datasheet, ComponentLink2URL=http://www.st.com/stonline/products/literature/ds/1989/m74hc595.pdf, DatasheetVersion=Apr-1993, LatestRevisionDate=13-Apr-2006, LatestRevisionNote="IPC-7351 Footprint Added.", PackageDescription="16-Pin Small Outline Integrated Circuit 1.27 mm Pitch", PackageReference=SO16, PackageVersion=May-1998, Published=8-Jun-2000, Publisher="Altium Limited"
Y1: "Crystal Oscillator", LatestRevisionDate=17-Jul-2002, LatestRevisionNote="Re-released for DXP Platform.", PackageDescription="Crystal, Thru-Hole; 2 Leads; Body 3.1 x 8.2 mm (Dia.xH)", PackageReference=R38, Published=8-Jun-2000, Publisher="Altium Limited"
L2: Code_IEC=1005, Code_JEITA=0402, LatestRevisionDate=29-May-2009, LatestRevisionNote="IPC-7351 Footprint Added.", PackageDescription="Chip Inductor", PackageReference=0402-A, Published=8-Jun-2000, Publisher="Altium Limited"

## Free pads (board coordinates)
  round 0.8 hole 0.5: 11(63.341,68.199) 12(66.326,68.199) 13(67.818,68.199) 14(64.834,68.199) 15(61.849,68.199) 16(72.009,143.891) 17(72.136,135.509) 18(8.509,144.145) 19(8.763,135.255) 20(133.604,151.13) 21(133.604,145.542) 22(88.392,151.13) 23(88.519,145.923) 24(116.967,105.41)

## Via types
v1: diameter 0.8, hole 0.5, Top Layer to Bottom Layer, 146 vias
v2: diameter 1, hole 0.5, Top Layer to Bottom Layer, 4 vias

## Nets (pads, with @x,y where several pads share a name; then routed paths per layer and width w, separated by ;. In a path a pad name is that pad's centre, name@x,y a point inside that pad or via, vN(x,y) a via of type N, cw(c..) or ccw(c..) an arc to the next point about the centre after c; other vN are vias at no path point)
3V3: C6.2 C9.2 C25.1 D13.2 L3.2 R16.2 R17.2 R18.2 U2.2 U4.18 | length 159.2
  Top Layer w0.3: v1(20.447,48.006) L3.2@20.447,37.846 20.547,37.946 20.787,37.946 22.084,39.243 22.098,39.243 22.86,40.005 24.638,40.005 ; C25.1@20.93,30.455 20.955,30.48 v1(24.638,30.48) ; v1(23.114,111.76) 27.076,111.76 R18.2@27.153,111.684 27.178,111.709 v1(27.178,113.157) ; v1(24.638,38.85) 24.638,40.005 ; U4.18@26.407,62.103 26.412,62.108 26.412,65.655 v1(26.416,65.659) ; R18.2@27.253,111.684 28.739,111.684 29.171,111.252 U2.2@30.121,111.252 34.163,111.252 38.354,115.443 43.838,115.443 46.641,112.64 46.641,109.55 R16.2@45.491,109.55 R17.2@43.078,109.55 ; D13.2@45.212,36.957 45.212,39.067 44.274,40.005 24.638,40.005
  Bottom Layer w0.3: v1(20.447,48.006) 25.634,53.193 26.885,53.193 27.805,54.113 27.805,54.727 29.135,56.058 C9.2@29.235,56.058 29.235,60.427 27.701,61.961 26.549,61.961 U4.18@26.407,62.103 ; v1(23.114,111.76) 23.114,68.961 v1(26.416,65.659) ; v1(24.638,30.48) v1(24.638,38.85) ; v1(27.178,113.157) 27.178,113.195 27.566,113.583 27.566,113.875 C6.2@28.016,114.325
5V0: C1.1 C2.2 C12.1 C13.1 C14.1 C22.2 C26.1 C29.2 C31.1 D11.2 L1.2 L2.1 L4.2 LCD1.2 LCD1.15 LS1.1 P12.4 P16.25 R1.1 R4.1 R9.1 R12.1 R36.2 R41.2 R42.2 R43.2 R44.2 R45.2 R54.2 S3.5 S3.6 S3.7 S3.8 U1.16 U3.21 U3.52 U5.3 U7.3 U7.4 U7.5 U7.16 U8.4 U9.20 U10.10 | length 622.9
  Top Layer w0.3: C31.1@3.302,22.86 3.302,28.321 ; P12.4@6.096,44.704 5.946,44.704 4.549,43.307 2.667,43.307 1.397,42.037 1.397,32.131 3.302,30.226 3.302,28.321 ; v1(6.211,59.944) 6.307,60.04 6.307,60.305 7.291,61.29 6.096,62.486 6.096,64.467 7.288,65.659 19.304,65.659 22.987,69.342 22.987,70.712 20.674,73.025 R1.1@20.574,73.025 v1(20.574,74.549) ; R41.2@6.477,117.475 6.477,116.078 7.366,115.189 19.685,115.189 20.599,114.275 R12.1@20.599,110.465 20.601,110.463 v1(20.601,109.48) ; v1(20.447,4.699) 20.472,4.674 R54.2@22.174,4.674 22.225,4.724 22.225,5.969 22.733,6.477 24.511,6.477 30.099,12.065 33.147,12.065 35.299,14.217 36.417,14.217 36.678,14.478 36.932,14.224 v1(38.862,14.224) v1(38.862,11.176) ; R4.1@20.472,85.7 20.574,85.598 v1(20.574,84.715) ; v1(20.574,81.788) 43.18,81.788 v1(43.307,81.661) 43.307,85.711 L1.2@43.205,85.813 ; v1(20.574,97.282) 20.574,98.12 R9.1@20.599,98.146 ; C26.1@20.93,32.766 20.93,32.666 19.98,31.716 19.98,29.894 18.407,28.321 3.302,28.321 ; C26.1@20.98,32.766 23.192,32.766 24.847,34.421 U5.3@24.847,36.251 ; v1(45.593,13.081) 45.593,16.64 U8.4@45.417,16.816 45.417,19.255 45.847,19.685 L4.2@45.847,26.924 ; v1(55.499,81.915) 59.487,81.915 C14.1@59.842,82.271 59.817,82.296 v1(59.817,85.344) ; v2(62.23,62.611) 62.23,60.164 U3.21@62.256,60.138 ; U3.52@68.681,76.2 68.681,73.989 v2(68.706,73.964) ; v1(69.977,85.471) 69.913,85.407 69.913,81.09 v1(69.85,81.026) 70.485,81.026 71.501,82.042 v1(84.201,82.042) ; v1(74.936,14.351) 75.616,14.351 75.819,14.554 75.819,15.367 75.565,15.621 U1.16@75.565,17.018 77.419,17.018 C2.2@77.445,16.993 83.16,16.993 85.09,18.923 LS1.1@89.789,18.923 ; v1(100.386,97.861) 104.766,102.24 S3.5@104.766,103.759 ; S3.7@104.766,108.839 104.781,108.854 105.94,108.854 109.583,112.497 R44.2@111.328,112.497 111.379,112.547 v1(111.379,114.046) ; v1(105.029,94.361) 105.039,94.351 106.596,94.351 U10.10@106.606,94.341 ; v1(108.544,103.673) 111.268,103.673 R42.2@111.455,103.861 111.455,103.761 111.905,103.311 112.005,103.311 112.825,102.491 122.047,102.491 R43.2@123.317,103.761 ; R43.2@123.317,103.861 R43.2@123.317,103.761 ; R45.2@123.317,112.497 123.342,112.522 v1(124.301,112.522) ; v1(124.301,103.886) 123.442,103.886 R43.2@123.317,103.761 ; C22.2@124.917,98.019 124.943,98.044 125.07,97.917 v1(125.857,97.917) 125.857,96.95 126.033,96.774 126.763,96.774 127.382,96.155 127.382,95.643 U9.20@127.394,95.631 ; P16.25@131.699,102.616 124.462,102.616 R43.2@123.317,103.761
  Bottom Layer w0.3: P12.4@6.096,44.704 5.946,44.704 4.846,45.804 4.445,45.804 ; v1(6.211,59.944) 4.846,58.579 4.846,46.205 4.445,45.804 ; R41.2@6.477,117.475 6.477,120.777 12.166,126.466 12.166,155.168 14.097,157.099 42.948,157.099 LCD1.15@45.241,154.806 ; v1(20.447,4.699) 19.177,5.969 19.177,26.162 10.668,34.671 2.159,34.671 1.397,35.433 1.397,42.164 2.306,43.073 2.306,45.16 2.95,45.804 4.445,45.804 ; v1(20.574,74.549) v1(20.574,81.788) v1(20.574,84.715) v1(20.574,97.282) 20.587,97.295 20.587,109.467 v1(20.601,109.48) ; v1(38.862,11.176) 52.07,11.176 54.991,14.097 74.422,14.097 74.58,14.255 74.841,14.255 v1(74.936,14.351) ; v1(38.862,14.224) 44.37,14.224 45.513,13.081 v1(45.593,13.081) ; v1(43.307,81.661) 55.245,81.661 v1(55.499,81.915) ; v1(59.817,85.344) 59.88,85.407 69.913,85.407 v1(69.977,85.471) ; L2.1@66.015,79.654 66.015,74.193 C12.1@66.421,73.787 ; L2.1@66.142,79.654 66.142,80.85 66.317,81.026 v1(69.85,81.026) ; v1(84.201,82.042) 84.455,82.042 97.524,95.111 100.457,95.111 ; v1(100.386,97.861) 100.457,97.79 100.457,95.111 ; S3.8@104.766,111.379 S3.7@104.766,108.839 S3.6@104.766,106.299 S3.5@104.766,103.759 104.923,103.602 108.473,103.602 v1(108.544,103.673) ; v1(105.029,94.361) 104.279,95.111 100.457,95.111 ; C29.2@106.959,135.179 107.019,135.119 U7.16@109.093,135.119 109.093,132.842 114.142,127.793 114.142,126.65 U7.3@114.173,126.619 ; v1(111.379,114.046) 114.173,116.84 U7.3@114.173,126.619 ; U7.5@119.253,126.619 U7.4@116.713,126.619 U7.3@114.173,126.619 ; v1(124.301,112.522) v1(124.301,103.886) 124.301,100.997 125.857,99.441 v1(125.857,97.917)
a: seg_mux1.2 U7.13 | length 4.9
  Top Layer w0.3: seg_mux1.2@115.316,139.446 115.316,137.795 116.713,136.398 U7.13@116.713,135.119
"A S": U3.39 U7.7 | length 136.7
  Top Layer w0.3: U3.39@73.087,66.969 78.145,66.969 97.35,86.174 97.35,97.418 102.13,102.198 102.13,112.026 109.874,119.77 118.162,119.77 121.64,116.291 121.64,109.328 123.585,107.383 124.476,107.383 127.854,104.006 134.915,104.006 135.589,104.68 135.589,105.632 134.717,106.504 131.064,106.504 130.349,107.22 130.349,108.284 129.54,109.093 129.54,111.18 125.992,114.728 125.992,117.039 126.451,117.498 126.451,123.104 124.333,125.222 U7.7@124.333,126.619
b: seg_mux1.6 U7.12 | length 16.3
  Bottom Layer w0.3: seg_mux1.6@105.156,139.446 105.156,138.846 106.842,137.16 117.348,137.16 119.253,135.255 U7.12@119.253,135.119
"B S": U3.40 U7.1 | length 83.4
  Top Layer w0.3: U3.40@73.087,67.769 78.183,67.769 96.85,86.436 96.85,97.625 101.016,101.791 101.016,114.162 112.883,126.029 112.883,127.137 112.151,127.869 110.343,127.869 U7.1@109.093,126.619
BT1: C18.2 R42.1 S2.2 U3.35 | length 72.3
  Top Layer w0.3: U3.35@73.087,63.769 78.12,63.769 99.35,84.999 99.35,94.939 106.553,102.142 106.553,104.699 S2.2@108.737,106.883 ; v1(108.712,107.95) 108.712,106.909 S2.2@108.737,106.883 ; v1(110.109,110.363) 111.303,110.363 C18.2@111.328,110.338 ; R42.1@113.64,103.861 113.64,103.961 110.717,106.883 S2.2@108.737,106.883
  Bottom Layer w0.3: v1(108.712,107.95) 110.109,109.347 v1(110.109,110.363)
BT2: C19.2 R43.1 S4.2 U3.36 | length 87.8
  Top Layer w0.3: U3.36@73.087,64.569 78.158,64.569 98.85,85.261 98.85,95.167 106.053,102.37 106.053,106.444 108.309,108.7 117.474,108.7 119.29,106.883 S4.2@120.04,106.883 ; v1(120.015,108.839) 120.015,106.909 S4.2@120.04,106.883 ; v1(122.39,110.363) 123.292,110.363 C19.2@123.317,110.338 ; R43.1@125.501,103.861 125.501,105.651 124.269,106.883 S4.2@120.04,106.883
  Bottom Layer w0.3: v1(120.015,108.839) 120.078,108.839 121.602,110.363 v1(122.39,110.363)
BT3: C20.2 R44.1 S5.2 U3.37 | length 80.7
  Top Layer w0.3: U3.37@73.087,65.369 78.169,65.369 98.35,85.55 98.35,96.915 103.241,101.806 103.241,111.621 107.265,115.646 S5.2@108.737,115.646 ; v1(108.712,116.84) 108.712,115.672 S5.2@108.737,115.646 ; v1(109.982,118.745) 111.303,118.745 C20.2@111.328,118.72 ; R44.1@113.513,112.497 113.513,113.817 111.684,115.646 S5.2@108.737,115.646
  Bottom Layer w0.3: v1(108.712,116.84) 108.712,117.475 v1(109.982,118.745)
BT4: C21.2 R45.1 S6.2 U3.38 | length 94
  Top Layer w0.3: U3.38@73.087,66.169 78.232,66.169 97.85,85.787 97.85,97.211 102.691,102.052 102.691,111.88 108.401,117.59 117.347,117.59 119.29,115.646 S6.2@120.04,115.646 120.086,115.692 v1(120.086,116.784) ; v1(121.666,118.618) 123.215,118.618 C21.2@123.317,118.72 123.317,115.769 125.501,113.584 R45.1@125.501,112.497
  Bottom Layer w0.3: v1(120.086,116.784) 120.086,116.911 121.666,118.491 v1(121.666,118.618)
BUZZER: R6.1 U3.29 | length 39.5
  Top Layer w0.3: v1(68.656,58.018) U3.29@68.656,60.138 ; R6.1@90.041,32.996 90.043,32.998 v1(90.043,35.052)
  Bottom Layer w0.3: v1(68.656,58.018) 68.656,56.775 69.92,55.511 75.934,55.511 90.043,41.402 v1(90.043,35.052)
c: seg_mux1.10 U7.11 | length 25.1
  Top Layer w0.3: seg_mux1.10@110.236,155.448 110.523,155.161 110.523,154.016 110.617,153.922 110.617,149.479 121.666,138.43 121.666,135.246 U7.11@121.793,135.119
C1: P13.5 U4.11 | length 17
  Bottom Layer w0.3: P13.5@11.735,49.936 14.834,49.936 16.657,48.113 18.425,48.113 22.215,44.323 U4.11@26.407,44.323
C2: P13.6 U4.10 | length 17
  Bottom Layer w0.3: P13.6@11.735,47.396 14.326,47.396 16.149,45.573 19.18,45.573 22.97,41.783 U4.10@26.407,41.783
C3: P13.7 U4.8 | length 6.4
  Bottom Layer w0.3: P13.7@11.735,44.856 14.453,44.856 14.986,44.323 U4.8@17.907,44.323
C4: P13.8 U4.7 | length 8.1
  Top Layer w0.3: P13.8@11.735,42.316 11.963,42.316 13.716,44.069 14.986,44.069 17.78,46.863 U4.7@17.907,46.863
"C S": U3.41 U7.2 | length 76.9
  Top Layer w0.3: U3.41@73.087,68.569 78.094,68.569 96.285,86.76 96.285,97.768 100.516,101.999 100.516,114.448 111.633,125.565 U7.2@111.633,126.619
d: seg_mux1.8 U7.10 | length 24.1
  Top Layer w0.3: seg_mux1.8@115.316,155.448 115.316,148.844 124.333,139.827 U7.10@124.333,135.119
D4: LCD1.11 U3.14 | length 104.1
  Top Layer w0.3: v1(49.85,122.996) 50.062,122.784 50.062,79.224 v1(50.165,79.121) ; v1(50.165,63.881) 50.3,63.881 50.412,63.769 U3.14@57.025,63.769
  Bottom Layer w0.3: LCD1.11@35.041,154.806 35.179,154.668 35.179,137.667 v1(49.85,122.996) ; v1(50.165,63.881) v1(50.165,79.121)
D5: LCD1.12 U3.15 | length 104.6
  Top Layer w0.3: v1(49.276,80.137) 49.1,80.313 49.1,124.41 v1(49.337,124.648) ; v1(49.53,62.992) 49.553,62.969 U3.15@57.025,62.969
  Bottom Layer w0.3: LCD1.12@37.566,154.806 37.592,154.78 37.592,136.099 49.044,124.648 v1(49.337,124.648) ; v1(49.276,80.137) 49.372,80.041 49.372,79.743 49.403,79.711 49.403,63.119 v1(49.53,62.992)
D6: LCD1.13 U3.16 | length 104.6
  Top Layer w0.3: v1(48.514,78.994) 48.514,125.984 v1(48.641,126.111) ; v1(48.707,62.169) U3.16@57.025,62.169
  Bottom Layer w0.3: LCD1.13@40.116,154.806 40.132,154.79 40.132,134.62 v1(48.641,126.111) ; v1(48.514,78.994) 48.514,62.497 48.707,62.304 v1(48.707,62.169)
D7: LCD1.14 U3.17 | length 109.5
  Top Layer w0.3: v1(47.625,61.468) 47.674,61.419 55.04,61.419 57.785,58.674 58.642,58.674 59.056,59.088 U3.17@59.056,60.138 ; v1(47.752,80.137) 47.752,90.144 47.871,90.263 47.871,119.88 47.879,119.888 47.879,127.635 v1(48.028,127.784)
  Bottom Layer w0.3: LCD1.14@42.666,154.806 42.672,154.8 42.672,133.141 v1(48.028,127.784) ; v1(47.625,61.468) 47.752,61.595 v1(47.752,80.137)
"D S": U3.42 U7.6 | length 90.9
  Top Layer w0.3: U3.42@73.087,69.369 73.114,69.342 78.05,69.342 95.719,87.011 95.719,97.909 100.016,102.206 100.016,115.266 107.825,123.075 107.825,126.387 107.843,126.405 107.843,128.193 108.019,128.369 120.043,128.369 U7.6@121.793,126.619
DA: R35.2 U3.25 U4.12 | length 46.6
  Top Layer w0.3: U3.25@65.456,60.138 65.459,60.135 65.459,57.912 65.529,57.982 v1(65.529,58.092)
  Bottom Layer w0.3: U4.12@26.407,46.863 26.407,47.269 26.812,47.674 26.812,47.767 27.559,48.514 29.108,48.514 R35.2@29.185,48.59 29.261,48.514 31.115,48.514 37.719,55.118 62.554,55.118 v1(65.529,58.092)
e: seg_mux1.7 U7.9 | length 24.2
  Top Layer w0.3: seg_mux1.7@117.856,155.448 117.729,155.321 117.729,148.971 126.873,139.827 U7.9@126.873,135.119
EN: LCD1.6 U3.10 | length 126.2
  Top Layer w0.3: LCD1.6@22.316,154.806 22.261,154.861 22.261,156.627 24.765,159.131 46.228,159.131 52.59,152.769 52.59,80.051 v1(52.612,80.029) ; v1(52.566,66.929) 52.586,66.949 57.005,66.949 U3.10@57.025,66.969
  Bottom Layer w0.3: v1(52.566,66.929) 52.59,66.953 52.59,80.007 v1(52.612,80.029)
f: seg_mux1.3 U7.15 | length 4.8
  Top Layer w0.3: U7.15@111.633,135.119 111.633,136.525 112.776,137.668 seg_mux1.3@112.776,139.446
g: seg_mux1.11 U7.14 | length 23.2
  Top Layer w0.3: seg_mux1.11@107.696,155.448 107.442,155.194 107.442,148.844 114.046,142.24 114.046,135.246 U7.14@114.173,135.119